# EAGLE board RFBoardLayoutGen0_v03.2TAD (EAGLE 7.5.0)
AUTHOR: Kirchschlager Raimund
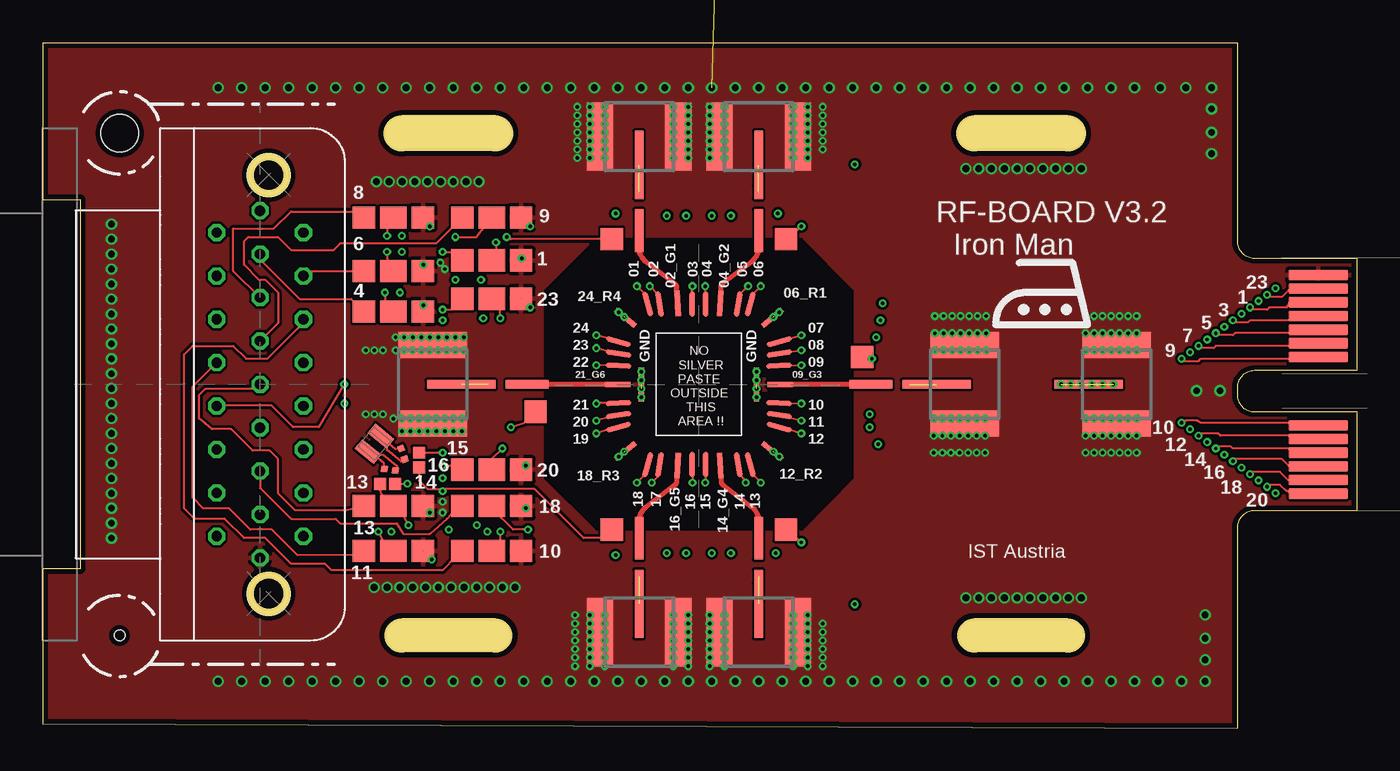
[diagram p0: board, top side]
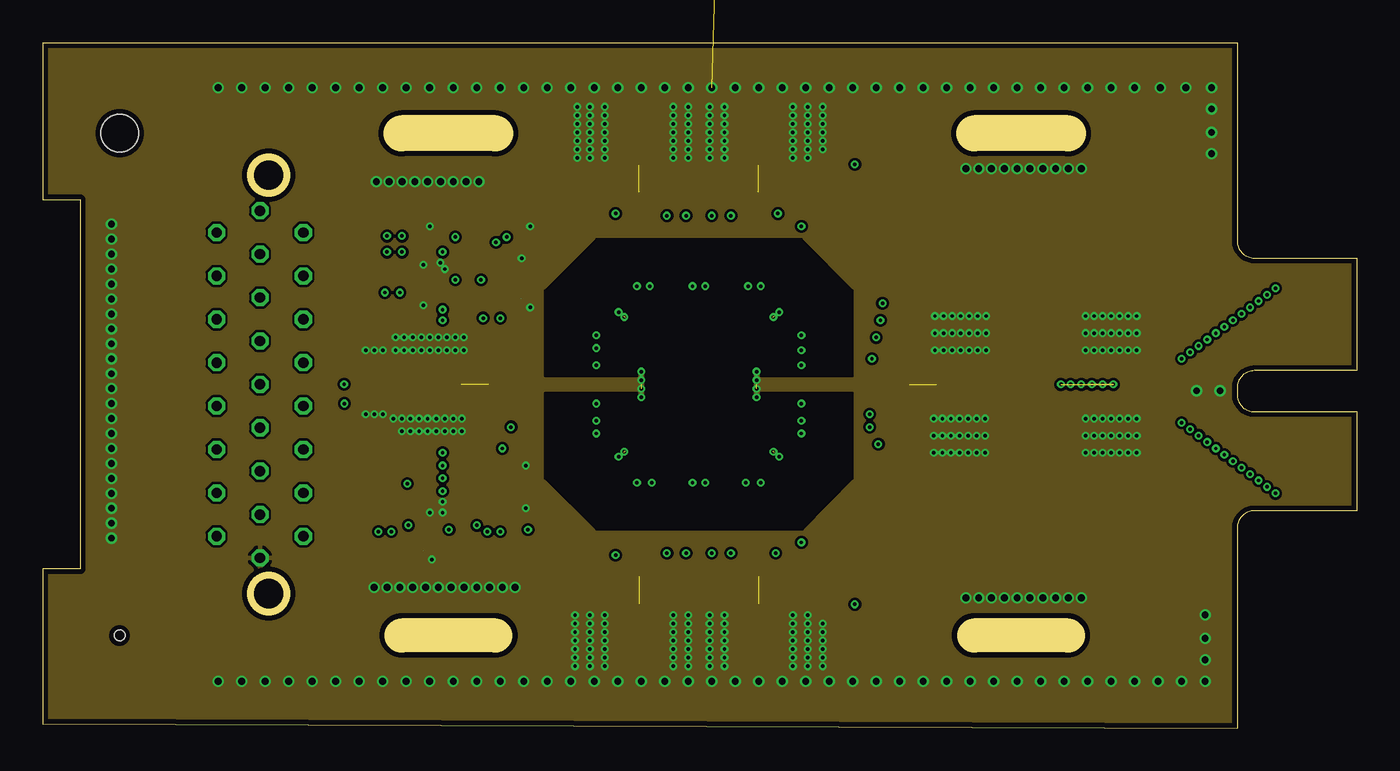
[diagram p1: board, inner layer Route2]
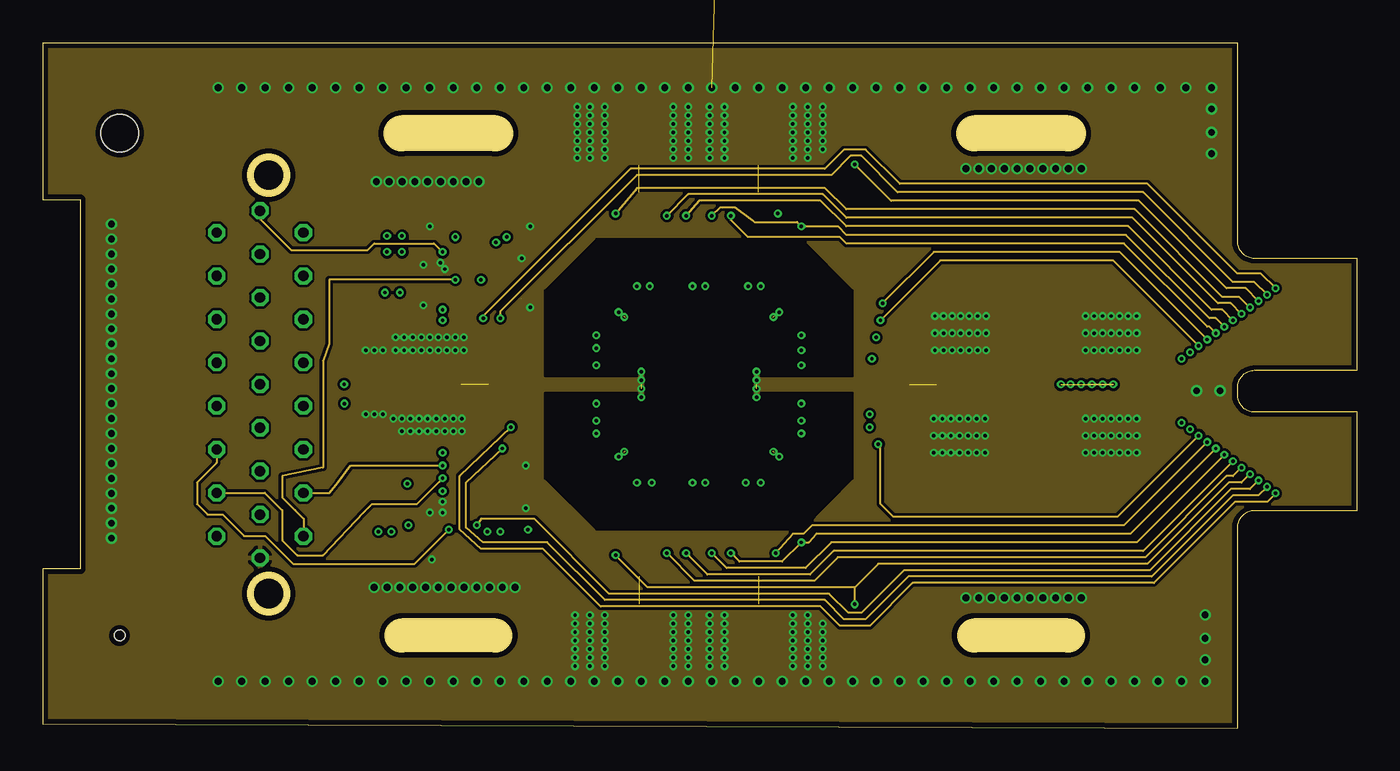
[diagram p2: board, inner layer Route3]
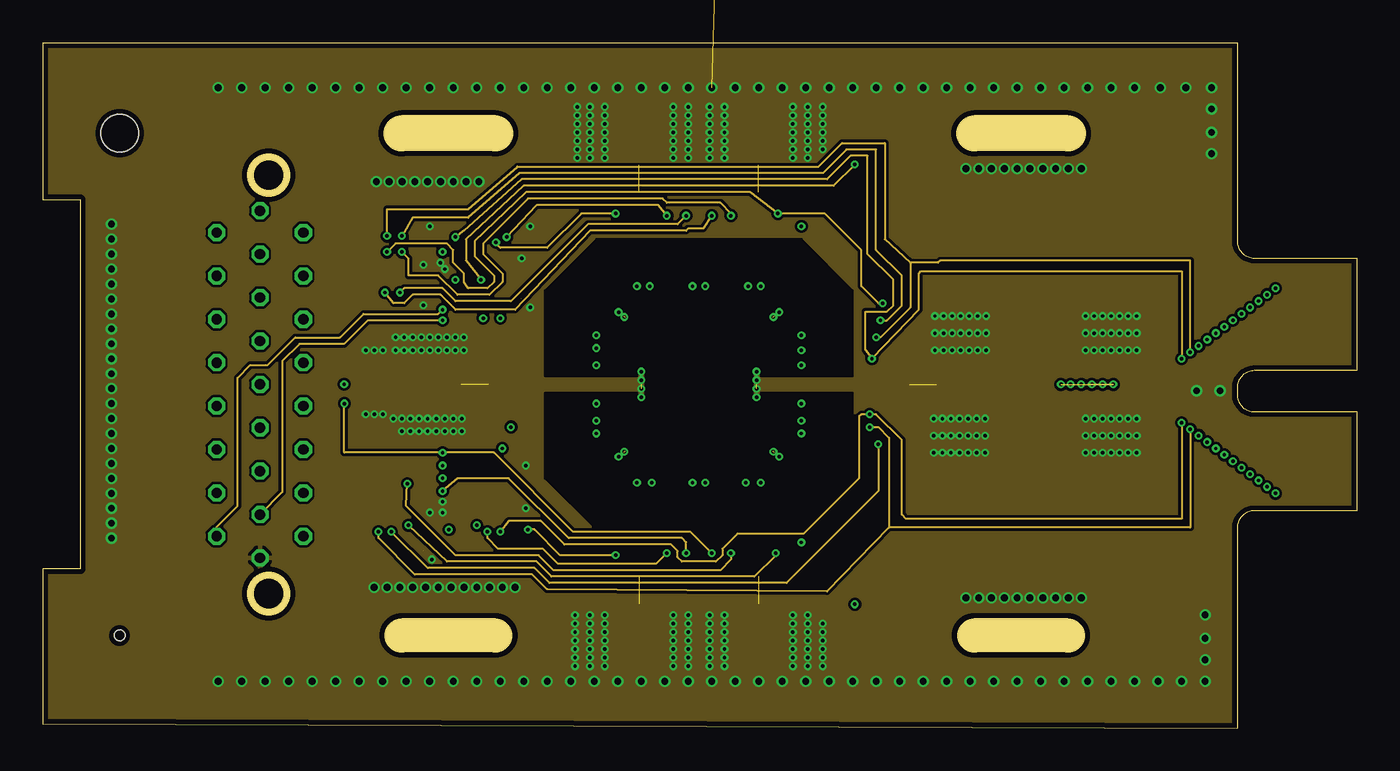
[diagram p3: board, inner layer Route14]
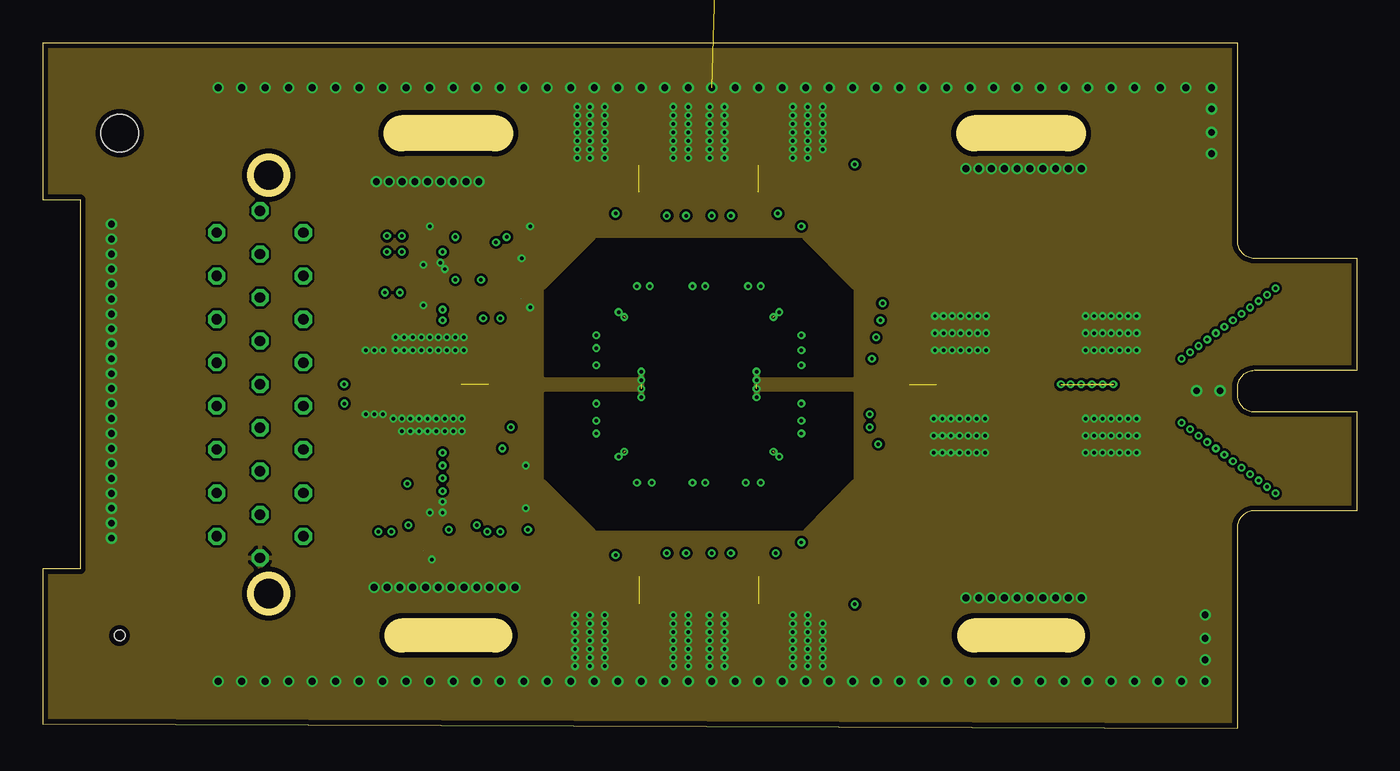
[diagram p4: board, inner layer Route15]
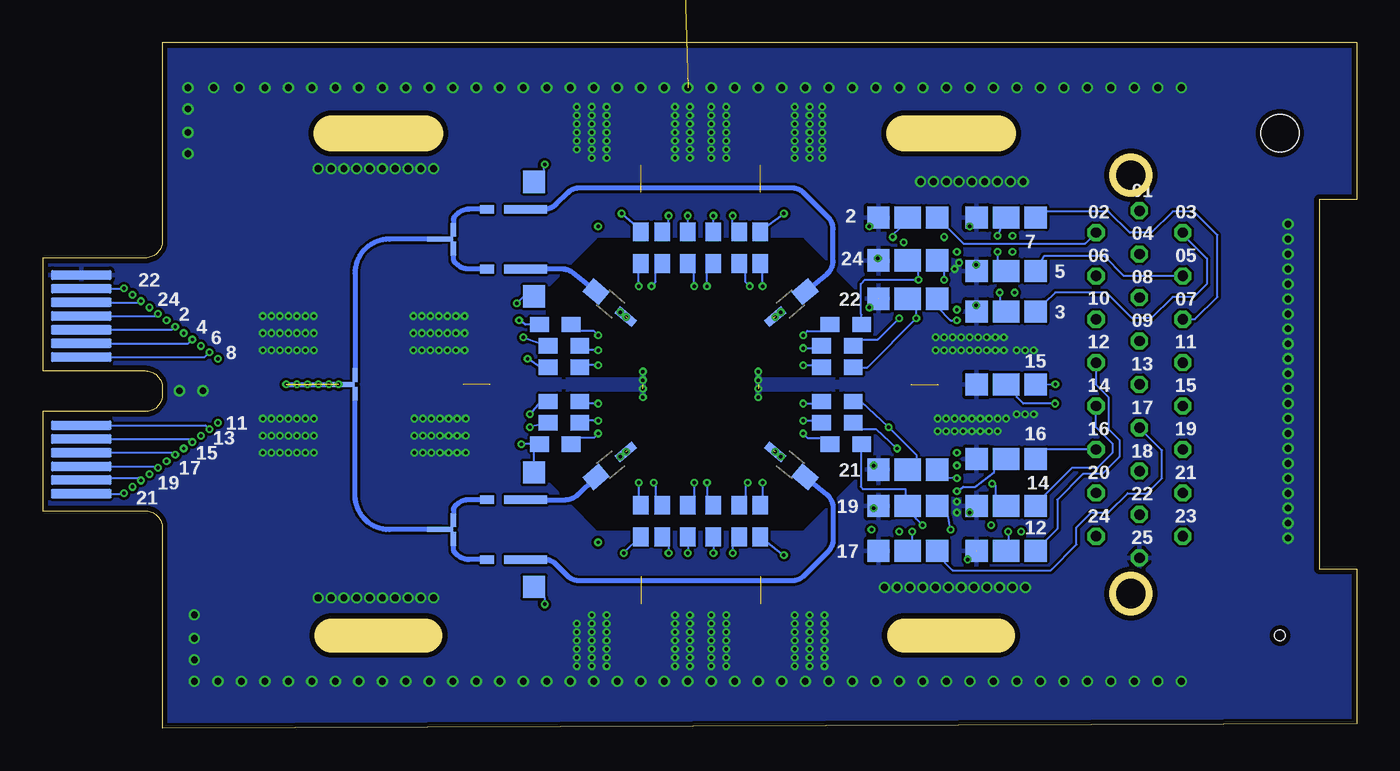
[diagram p5: board, bottom side, seen from below]

Size 76.9 x 40.12 mm. Coordinates in mm from the lower left corner, seen from the top.
Outline: 26.5,5.43 21,5.43
Outline: 26.5,34.83 21,34.83
Outline: 60,34.83 54.5,34.83
Outline: 60,5.43 54.5,5.43
Outline: 0,40.12 0,30.93 2.2,30.93 2.2,9.32 0,9.32 0,0.25 69.9,0 69.9,11.72 arc-90 70.9,12.72 76.9,12.72 76.9,18.52 70.9,18.52 arc-90 69.9,19.52 69.9,19.93 arc-90 70.9,20.93 76.9,20.93 76.9,27.52 70.9,27.52 arc-90 69.9,28.52 69.9,40.12 0,40.12
Outline: circle at 13.22,7.88 radius 1.06
Outline: circle at 13.22,32.38 radius 1.06
Copper layers (1+2+3*14+15+16): Top 0.035mm / dielectric 0.2mm / Route2 0.035mm / dielectric 0.36mm / Route3 0.035mm / dielectric 0.28mm / Route14 0.035mm / dielectric 0.36mm / Route15 0.035mm / dielectric 0.2mm / Bottom 0.035mm
Design rules "PCB-POOL HighSpec_ML6+ *": minimum track width 0.125mm, minimum drill 0.2mm, track to track 0.125mm, track to pad 0.125mm, pad to pad 0.125mm, via to via 0.125mm, smd to smd 0.125mm, copper to edge 0.3mm, drill to drill 0.2mm, minimum pad ring 0.2mm, minimum via ring 0.125mm, stop-mask expansion 0.065mm, vias tented up to drill 0.3mm, thermal gap 0.2mm
Net classes: 0 GND: clearance 0.15 mm; 1 RF: clearance 2 mm
Holes 0.6 mm at 4.5,5.43
Holes 2.2 mm at 4.5,34.83

## Footprints (pad centres in the part's own frame; a part is rotated, then mirrored left to right if it is on the bottom)
BIAS_TEE_DOWN_0603 = smd 0.8 x 0.5: HF 2.75,0 | smd 1.3 x 1.3: LF 0,1.6 | smd 2.5 x 0.5: OUT 0.5,0
BIAS_TEE_UP_0603 = smd 0.8 x 0.5: HF 2.75,0 | smd 1.3 x 1.3: LF 0,-1.6 | smd 2.5 x 0.5: OUT 0.5,0
24DC+10RF/400MU-PADS/0.7X0.7_V1.0 = smd 1.5 x 0.3 rotated 105: DC$01 -3,4.7 | smd 1.5 x 0.3 rotated 99: DC§02 -2.3,4.7 | smd 0.3 x 1.5: DC§03 -0.4,4.7; DC§04 0.4,4.7; DC§15 0.4,-4.7; DC§16 -0.4,-4.7 | smd 1.5 x 0.3 rotated 81: DC§05 2.3,4.7 | smd 1.5 x 0.3 rotated 75: DC§06 3,4.7 | smd 1.5 x 0.3 rotated 195: DC§07 4.7,2.5 | smd 1.5 x 0.3 rotated 189: DC§08 4.7,1.8 | smd 1.5 x 0.3 rotated 183: DC§09 4.7,1.1 | smd 1.5 x 0.3 rotated 177: DC§10 4.7,-1.1 | smd 1.5 x 0.3 rotated 171: DC§11 4.7,-1.8 | smd 1.5 x 0.3 rotated 165: DC§12 4.7,-2.5 | smd 1.5 x 0.3 rotated 285: DC§13 3,-4.7 | smd 1.5 x 0.3 rotated 279: DC§14 2.3,-4.7 | smd 1.5 x 0.3 rotated 261: DC§17 -2.3,-4.7 | smd 1.5 x 0.3 rotated 255: DC§18 -3,-4.7 | smd 1.5 x 0.3 rotated 15: DC§19 -4.7,-2.5 | smd 1.5 x 0.3 rotated 9: DC§20 -4.7,-1.8 | smd 1.5 x 0.3 rotated 3: DC§21 -4.7,-1.1 | smd 1.5 x 0.3 rotated 357: DC§22 -4.7,1.1 | smd 1.5 x 0.3 rotated 351: DC§23 -4.7,1.8 | smd 1.5 x 0.3 rotated 345: DC§24 -4.7,2.5 | smd 0.3 x 2: GND$1 -3.375,0; GND$2 3.375,0 | smd 1.5 x 0.3 rotated 93: RF$02_G1 -1.25,4.75 | smd 1.5 x 0.3 rotated 87: RF$04_G2 1.25,4.75 | smd 1.5 x 0.3 rotated 40: RF$06_R1 4.3,3.9; RF$18_R3 -4.3,-3.9 | smd 1.5 x 0.3: RF$09_G3 4.75,0; RF$21_G6 -4.75,0 | smd 1.5 x 0.3 rotated 140: RF$12_R2 4.3,-3.9; RF$24_R4 -4.3,3.9 | smd 1.5 x 0.3 rotated 273: RF$14_G4 1.25,-4.75 | smd 1.5 x 0.3 rotated 267: RF$16_G5 -1.25,-4.75
25_SOCKET_M83513/13-D_V2 = drill 0.6 octagon: 01 10.16,0; 02 8.89,-2.54; 03 8.89,2.54; 04 7.62,0; 05 6.35,2.54; 06 6.35,-2.54; 07 3.81,2.54; 08 5.08,0; 09 2.54,0; 10 3.81,-2.54; 11 1.27,2.54; 12 1.27,-2.54; 13 0,0; 14 -1.27,-2.54; 15 -1.27,2.54; 16 -3.81,-2.54; 17 -2.54,0; 18 -5.08,0; 19 -3.81,2.54; 20 -6.35,-2.54; 21 -6.35,2.54; 22 -7.62,0; 23 -8.89,2.54; 24 -8.89,-2.54; 25 -10.16,0
SMD0.8-0,5 = smd 0.8 x 0.5: 1 0,0
L_MATCH = smd 1.25 x 1: IN 1.125,0 | smd 1.3 x 0.5: OUT -1.15,0
LP-FILTER/1_STAGE/OS/0603_TOP = smd 1.3 x 1.3: $1 -1.6,0.01; $6 1.85,0.01 | smd 1.55 x 1.3: $4 0.125,0.01
LP-FILTER/1_STAGE/OS/0603_BOTTOM = smd 1.3 x 1.3 bottom: $1 -1.6,0.01; $6 1.85,0.01 | smd 1.55 x 1.3 bottom: $4 0.125,0.01
LP-FILTER/RESISTOR/0603_BOTTOM = smd 1.1 x 0.9 bottom: IN -0.925,0; OUT 0.925,0
SMP_STRAIGHT_MINI_WIDE = smd 0.5 x 4: 1 0,1.653 | smd 1.524 x 4: 2@1 -2.292,0; 2@2 2.292,0
TP07SQ = smd 0.7 x 0.7: TP 0,0
MEC8-113-02-L-D-RA1 = smd 0.6 x 3.5: 1 6.4,0.15; 3 5.6,0.15; 5 4.8,0.15; 7 4,0.15; 9 3.2,0.15; 11 2.4,0.15; 13 -1.6,0.15; 15 -2.4,0.15; 17 -3.2,0.15; 19 -4,0.15; 21 -4.8,0.15; 23 -5.6,0.15; 25 -6.4,0.15 | smd 0.6 x 3.5 bottom: 2 6.4,0.15; 4 5.6,0.15; 6 4.8,0.15; 8 4,0.15; 10 3.2,0.15; 12 2.4,0.15; 14 -1.6,0.15; 16 -2.4,0.15; 18 -3.2,0.15; 20 -4,0.15; 22 -4.8,0.15; 24 -5.6,0.15; 26 -6.4,0.15
RX-BR_V1 = smd 0.406 x 0.406 rotated 105: I$1 -0.02,1.08; U$1 0.63,1.23 | smd 0.406 x 0.406 rotated 165: I$2 1.08,-0.02; U$2 1.23,0.63 | smd 1.422 x 0.711 rotated 45: P$2 -0.02,-0.87; P$3 -0.87,-0.02
T_JUNCTION_0.3MM = smd 0.3 x 1.5 bottom: P$1 0,-0.75 | smd 0.8 x 0.3 bottom: P$2 -0.55,0.03; P$3 0.55,0.03 | smd 1 x 0.125 bottom: P$4 0,-0.06

## Placement (x,y rotation side)
B$1  [BIAS_TEE_DOWN_0603]  34.9,28.62 90 top
B$2  [BIAS_TEE_UP_0603]  41.9,28.62 90 top
B$3  BIASTEEDOWN  [BIAS_TEE_DOWN_0603]  47.96,20.12 0 top
B$4  [BIAS_TEE_DOWN_0603]  41.9,11.62 270 top
B$5  [BIAS_TEE_UP_0603]  34.9,11.62 270 top
B$6  BIASTEEDOWN  [BIAS_TEE_DOWN_0603]  28.84,20.12 180 top
B$7  [BIAS_TEE_UP_0603]  48.15,30.38 180 bottom
B$8  [BIAS_TEE_DOWN_0603]  48.15,26.88 180 bottom
B$9  [BIAS_TEE_UP_0603]  48.15,13.38 180 bottom
B$10  [BIAS_TEE_DOWN_0603]  48.15,9.88 180 bottom
E$1  24DC+10RF  [24DC+10RF/400MU-PADS/0.7X0.7_V1.0]  38.4,20.12 0 top
E$2  [25_SOCKET_M83513/13-D_V2]  12.71,20.12 90 top
E$30  [SMD0.8-0,5]  50.9,13.38 0 bottom
L$1  L_MATCH  [L_MATCH]  33.14,24.82 40 bottom
L$2  L_MATCH  [L_MATCH]  43.66,24.82 140 bottom
L$3  L_MATCH  [L_MATCH]  43.66,15.43 220 bottom
L$4  L_MATCH  [L_MATCH]  33.14,15.43 320 bottom
LP$1  LP-FILTER/1-STAGETOP  [LP-FILTER/1_STAGE/OS/0603_TOP]  20.4,29.88 0 top
LP$2  LP-FILTER/1-STAGETOP  [LP-FILTER/1_STAGE/OS/0603_TOP]  20.4,26.75 0 top
LP$3  LP-FILTER/1-STAGETOP  [LP-FILTER/1_STAGE/OS/0603_TOP]  20.4,24.38 0 top
LP$4  LP-FILTER/1-STAGETOP  [LP-FILTER/1_STAGE/OS/0603_TOP]  20.4,20.12 180 bottom
LP$5  LP-FILTER/1-STAGETOP  [LP-FILTER/1_STAGE/OS/0603_TOP]  20.4,13 0 top
LP$6  LP-FILTER/1-STAGETOP  [LP-FILTER/1_STAGE/OS/0603_TOP]  20.4,10.38 0 top
LP$7  LP-FILTER/1-STAGEBOT  [LP-FILTER/1_STAGE/OS/0603_BOTTOM]  20.4,29.88 0 top
LP$8  LP-FILTER/1-STAGEBOT  [LP-FILTER/1_STAGE/OS/0603_BOTTOM]  20.4,26.75 0 top
LP$9  LP-FILTER/1-STAGEBOT  [LP-FILTER/1_STAGE/OS/0603_BOTTOM]  20.4,24.38 0 top
LP$10  LP-FILTER/1-STAGEBOT  [LP-FILTER/1_STAGE/OS/0603_BOTTOM]  26.15,29.88 0 top
LP$11  LP-FILTER/1-STAGEBOT  [LP-FILTER/1_STAGE/OS/0603_BOTTOM]  26.15,10.38 0 top
LP$12  LP-FILTER/1-STAGEBOT  [LP-FILTER/1_STAGE/OS/0603_BOTTOM]  20.4,15.75 0 top
LP$13  LP-FILTER/1-STAGEBOT  [LP-FILTER/1_STAGE/OS/0603_BOTTOM]  20.4,13 0 top
LP$14  LP-FILTER/1-STAGEBOT  [LP-FILTER/1_STAGE/OS/0603_BOTTOM]  20.4,10.38 0 top
LP$15  LP-FILTER/1-STAGETOP  [LP-FILTER/1_STAGE/OS/0603_TOP]  26.15,29.88 0 top
LP$16  LP-FILTER/1-STAGETOP  [LP-FILTER/1_STAGE/OS/0603_TOP]  26.15,27.38 0 top
LP$17  LP-FILTER/1-STAGETOP  [LP-FILTER/1_STAGE/OS/0603_TOP]  26.15,25.12 0 top
LP$18  LP-FILTER/1-STAGETOP  [LP-FILTER/1_STAGE/OS/0603_TOP]  26.15,15.12 0 top
LP$19  LP-FILTER/1-STAGETOP  [LP-FILTER/1_STAGE/OS/0603_TOP]  26.15,13 0 top
LP$20  LP-FILTER/1-STAGETOP  [LP-FILTER/1_STAGE/OS/0603_TOP]  26.15,10.38 0 top
LP$21  LP-FILTER/1-STAGEBOT  [LP-FILTER/1_STAGE/OS/0603_BOTTOM]  26.15,27.38 0 top
LP$22  LP-FILTER/1-STAGEBOT  [LP-FILTER/1_STAGE/OS/0603_BOTTOM]  26.15,25.12 0 top
LP$23  LP-FILTER/1-STAGEBOT  [LP-FILTER/1_STAGE/OS/0603_BOTTOM]  26.15,15.12 0 top
LP$24  LP-FILTER/1-STAGEBOT  [LP-FILTER/1_STAGE/OS/0603_BOTTOM]  26.15,13 0 top
R$1  10K  [LP-FILTER/RESISTOR/0603_BOTTOM]  34.9,28.12 270 top
R$2  10K  [LP-FILTER/RESISTOR/0603_BOTTOM]  36.15,28.12 270 top
R$3  10K  [LP-FILTER/RESISTOR/0603_BOTTOM]  37.65,28.12 270 top
R$4  10K  [LP-FILTER/RESISTOR/0603_BOTTOM]  39.15,28.12 270 top
R$5  10K  [LP-FILTER/RESISTOR/0603_BOTTOM]  40.65,28.12 270 top
R$6  10K  [LP-FILTER/RESISTOR/0603_BOTTOM]  41.9,28.12 270 top
R$7  10K  [LP-FILTER/RESISTOR/0603_BOTTOM]  46.4,22.38 180 top
R$8  10K  [LP-FILTER/RESISTOR/0603_BOTTOM]  46.4,21.12 180 top
R$9  10K  [LP-FILTER/RESISTOR/0603_BOTTOM]  46.4,19.12 180 top
R$10  10K  [LP-FILTER/RESISTOR/0603_BOTTOM]  46.4,17.88 180 top
R$11  10K  [LP-FILTER/RESISTOR/0603_BOTTOM]  46.9,16.62 180 top
R$12  10K  [LP-FILTER/RESISTOR/0603_BOTTOM]  41.9,12.12 90 top
R$19  10K  [LP-FILTER/RESISTOR/0603_BOTTOM]  29.9,16.62 0 top
R$20  10K  [LP-FILTER/RESISTOR/0603_BOTTOM]  30.4,17.88 0 top
R$21  10K  [LP-FILTER/RESISTOR/0603_BOTTOM]  30.4,19.12 0 top
R$22  10K  [LP-FILTER/RESISTOR/0603_BOTTOM]  30.4,21.12 0 top
R$23  10K  [LP-FILTER/RESISTOR/0603_BOTTOM]  30.4,22.38 0 top
R$24  10K  [LP-FILTER/RESISTOR/0603_BOTTOM]  29.9,23.62 0 top
R$25  10K  [LP-FILTER/RESISTOR/0603_BOTTOM]  46.9,23.62 180 top
R$26  10K  [LP-FILTER/RESISTOR/0603_BOTTOM]  40.65,12.12 90 top
R$27  10K  [LP-FILTER/RESISTOR/0603_BOTTOM]  39.15,12.12 90 top
R$28  10K  [LP-FILTER/RESISTOR/0603_BOTTOM]  37.65,12.12 90 top
R$29  10K  [LP-FILTER/RESISTOR/0603_BOTTOM]  36.15,12.12 90 top
R$30  10K  [LP-FILTER/RESISTOR/0603_BOTTOM]  34.9,12.12 90 top
S$1  MC-921WIDE  [SMP_STRAIGHT_MINI_WIDE]  22.84,20.12 270 top
S$2  MC-921WIDE  [SMP_STRAIGHT_MINI_WIDE]  34.9,5.62 0 top
S$3  MC-921WIDE  [SMP_STRAIGHT_MINI_WIDE]  41.9,5.62 0 top
S$4  MC-921WIDE  [SMP_STRAIGHT_MINI_WIDE]  53.96,20.12 90 top
S$5  MC-921WIDE  [SMP_STRAIGHT_MINI_WIDE]  62.85,20.12 90 top
S$6  MC-921WIDE  [SMP_STRAIGHT_MINI_WIDE]  41.9,34.62 180 top
S$7  MC-921WIDE  [SMP_STRAIGHT_MINI_WIDE]  34.9,34.62 180 top
TP1  TPTP07SQ  [TP07SQ]  22.02,16.12 0 top
TP2  TPTP07SQ  [TP07SQ]  22.02,15.25 0 top
TP3  TPTP07SQ  [TP07SQ]  20.62,14.31 0 top
TP4  TPTP07SQ  [TP07SQ]  19.74,14.31 90 top
U$1  MEC8-113-02-L-D-RA1MBRD  [MEC8-113-02-L-D-RA1]  74.5,20.12 270 top
U$2  TEMPSENS  [RX-BR_V1]  19.9,16.25 275.6 top
U$3  TJUNCTION  [T_JUNCTION_0.3MM]  52.9,28.62 90 top
U$4  TJUNCTION  [T_JUNCTION_0.3MM]  58.65,20.12 90 top
U$5  TJUNCTION  [T_JUNCTION_0.3MM]  52.9,11.62 90 top

## Library data of the parts
B$1-B$10 = Bias tee
E$1 = SampleArea
E$2 = Glenair
E$30 = PADS
L$1-L$4 = MatchCircuit
LP$1-LP$24 R$1-R$12 R$19-R$30 = LPFilter
S$1-S$7 = RF Connectors
TP1-TP4 = testpad
U$1 = MEC8-130-02-X-D-RA1
U$2 = TempSensors
U$3-U$5 = RF layout parts

## Nets
$1234567254654: E$1.GND$1 E$1.GND$2 E$2.25 LP$1.$6 LP$2.$6 LP$3.$6 LP$4.$6 LP$5.$6 LP$6.$6 LP$7.$6 LP$8.$6 LP$9.$6 LP$10.$6 LP$11.$6 LP$12.$6 LP$13.$6 LP$14.$6 LP$15.$6 LP$16.$6 LP$17.$6 LP$18.$6 LP$19.$6 LP$20.$6 LP$21.$6 LP$22.$6 LP$23.$6 LP$24.$6 S$1.2@1 S$1.2@2 S$2.2@1 S$2.2@2 S$3.2@1 S$3.2@2 S$4.2@1 S$4.2@2 S$5.2@1 S$5.2@2 S$6.2@1 S$6.2@2 S$7.2@1 S$7.2@2 U$1.25 U$1.26
C$1: E$2.01 LP$16.$1
C$2: E$2.02 LP$10.$1
C$3: E$2.03 LP$9.$1
C$4: E$2.04 LP$3.$1
C$5: E$2.05 LP$8.$1
C$6: E$2.06 LP$2.$1
C$7: E$2.07 LP$7.$1
C$8: E$2.08 LP$1.$1
C$9: E$2.09 LP$15.$1
C$10: E$2.10 LP$20.$1
C$11: E$2.11 LP$6.$1
C$12: E$2.12 LP$14.$1
C$13: E$2.13 LP$5.$1
C$14: E$2.14 LP$13.$1
C$15: E$2.15 LP$4.$1
C$16: E$2.16 LP$12.$1
C$17: E$2.17 LP$11.$1
C$18: E$2.18 LP$19.$1
C$19: E$2.19 LP$24.$1
C$20: E$2.20 LP$18.$1
C$21: E$2.21 LP$23.$1
C$22: E$2.22 LP$22.$1
C$23: E$2.23 LP$17.$1
C$24: E$2.24 LP$21.$1
D$1: LP$16.$4 R$1.IN U$1.21
D$2: B$1.LF LP$10.$4 R$2.IN U$1.20
D$3: LP$9.$4 R$3.IN U$1.19
D$4: B$2.LF LP$3.$4 R$4.IN U$1.18
D$5: LP$8.$4 R$5.IN U$1.17
D$6: B$8.LF LP$2.$4 R$6.IN U$1.16
D$7: LP$7.$4 R$25.IN U$1.15
D$8: LP$1.$4 R$7.IN U$1.14
D$9: B$3.LF LP$15.$4 R$8.IN U$1.13
D$10: LP$20.$4 R$9.IN U$1.11
D$11: LP$6.$4 R$10.IN U$1.12
D$12: B$9.LF LP$14.$4 R$11.IN U$1.9
D$13: LP$5.$4 R$12.IN TP4.TP U$1.10
D$14: B$4.LF LP$13.$4 R$26.IN TP3.TP U$1.7
D$15: LP$4.$4 R$27.IN TP1.TP U$1.8
D$16: B$5.LF LP$12.$4 R$28.IN TP2.TP U$1.5
D$17: LP$11.$4 R$29.IN U$1.6
D$18: B$10.LF LP$19.$4 R$30.IN U$1.3
D$19: LP$24.$4 R$19.IN U$1.4
D$20: LP$18.$4 R$20.IN U$1.1
D$21: B$6.LF LP$23.$4 R$21.IN U$1.2
D$22: LP$22.$4 R$22.IN U$1.24
D$23: LP$17.$4 R$23.IN U$1.23
D$24: B$7.LF LP$21.$4 R$24.IN U$1.22
DC$1: E$1.DC$01 R$1.OUT
DC$2: E$1.DC§02 R$2.OUT
DC$3: E$1.DC§03 R$3.OUT
DC$4: E$1.DC§04 R$4.OUT
DC$5: E$1.DC§05 R$5.OUT
DC$6: E$1.DC§06 R$6.OUT
DC$7: E$1.DC§07 R$25.OUT
DC$8: E$1.DC§08 R$7.OUT
DC$9: E$1.DC§09 R$8.OUT
DC$10: E$1.DC§10 R$9.OUT
DC$11: E$1.DC§11 R$10.OUT
DC$12: E$1.DC§12 R$11.OUT
DC$13: E$1.DC§13 R$12.OUT
DC$14: E$1.DC§14 R$26.OUT
DC$15: E$1.DC§15 R$27.OUT
DC$16: E$1.DC§16 R$28.OUT
DC$17: E$1.DC§17 R$29.OUT
DC$18: E$1.DC§18 R$30.OUT
DC$19: E$1.DC§19 R$19.OUT
DC$20: E$1.DC§20 R$20.OUT
DC$21: E$1.DC§21 R$21.OUT
DC$22: E$1.DC§22 R$22.OUT
DC$23: E$1.DC§23 R$23.OUT
DC$24: E$1.DC§24 R$24.OUT
N$1 [RF]: B$6.HF S$1.1
N$2: E$1.RF$12_R2 L$3.OUT
N$3 [RF]: B$1.OUT E$1.RF$02_G1
N$4 [RF]: B$2.OUT E$1.RF$04_G2
N$5 [RF]: B$1.HF S$7.1
N$6 [RF]: B$2.HF S$6.1
N$7 [RF]: B$5.OUT E$1.RF$16_G5
N$8 [RF]: B$4.OUT E$1.RF$14_G4
N$9 [RF]: E$1.RF$18_R3 L$4.OUT
N$10 [RF]: E$1.RF$24_R4 L$1.OUT
N$11 [RF]: E$1.RF$06_R1 L$2.OUT
N$12 [RF]: B$3.OUT E$1.RF$09_G3
N$13 [RF]: B$9.OUT L$3.IN
N$14 [RF]: B$8.OUT L$2.IN
N$15 [RF]: B$9.HF U$5.P$3
N$16 [RF]: B$5.HF S$2.1
N$17 [RF]: B$4.HF S$3.1
N$18 [RF]: B$3.HF S$4.1
N$19 [RF]: B$7.HF U$3.P$3
N$20 [RF]: B$6.OUT E$1.RF$21_G6
N$21 [RF]: S$5.1 U$4.P$1
N$22 [RF]: B$10.HF U$5.P$2
N$23 [RF]: B$8.HF U$3.P$2
N$25 [RF]: U$3.P$1 U$4.P$3
N$26 [RF]: U$4.P$2 U$5.P$1
RF$3 [RF]: B$10.OUT L$4.IN
RF$4 [RF]: B$7.OUT L$1.IN

## Tracks (layer width: path | path; a pad name or v marks a point on that pad's centre or on a via)
$1234567254654  (via drill 0.2, 0.4)  (6 unrouted)
  other vias: 52.21,24.12 52.71,24.12 53.21,24.12 53.71,24.12 54.21,24.12 54.71,24.12 55.21,24.12 52.21,23.12 52.71,23.12 53.21,23.12 53.71,23.12 54.21,23.12 54.71,23.12 55.21,23.12 52.21,22.12 52.71,22.12 53.21,22.12 53.71,22.12 54.21,22.12 54.71,22.12 55.21,22.12 52.15,18.12 52.65,18.12 53.15,18.12 53.65,18.12 54.15,18.12 54.65,18.12 55.15,18.12 52.15,17.12 52.65,17.12 53.15,17.12 53.65,17.12 54.15,17.12 54.65,17.12 55.15,17.12 52.15,16.12 52.65,16.12 53.15,16.12 53.65,16.12 54.15,16.12 54.65,16.12 55.15,16.12 61.02,24.12 61.52,24.12 62.02,24.12 62.52,24.12 63.02,24.12 63.52,24.12 64.03,24.12 61.02,23.12 61.52,23.12 62.02,23.12 62.52,23.12 63.02,23.12 63.52,23.12 64.03,23.12 61.02,22.12 61.52,22.12 62.02,22.12 62.52,22.12 63.02,22.12 63.52,22.12 64.03,22.12 61.02,18.12 61.52,18.12 62.02,18.12 62.52,18.12 63.02,18.12 63.52,18.12 64.03,18.12 61.02,17.12 61.52,17.12 62.02,17.12 62.52,17.12 63.02,17.12 63.52,17.12 64.03,17.12 61.02,16.12 61.52,16.12 62.02,16.12 62.52,16.12 63.02,16.12 63.52,16.12 64.03,16.12 32.9,36.38 32.9,35.88 32.9,35.38 32.9,34.88 32.9,34.38 32.9,33.88 32.9,33.38 32.02,36.38 32.02,35.88 32.02,35.38 32.02,34.88 32.02,34.38 32.02,33.88 32.02,33.38 31.27,33.38 31.27,33.88 31.27,34.38 31.27,34.88 31.27,35.38 31.27,35.88 31.27,36.38 36.9,36.38 36.9,35.88 36.9,35.38 36.9,34.88 36.9,34.38 36.9,33.88 36.9,33.38 39.9,36.38 39.9,35.88 39.9,35.38 39.9,34.88 39.9,34.38 39.9,33.88 39.9,33.38 37.77,36.38 37.77,35.88 37.77,35.38 37.77,34.88 37.77,34.38 37.77,33.88 37.77,33.38 39.02,33.38 39.02,33.88 39.02,34.38 39.02,34.88 39.02,35.38 39.02,35.88 39.02,36.38 43.9,36.38 43.9,35.88 43.9,35.38 43.9,34.88 43.9,34.38 43.9,33.88 43.9,33.38 44.77,33.38 44.77,33.88 44.77,34.38 44.77,34.88 44.77,35.38 44.77,35.88 44.77,36.38 45.65,33.88 45.65,34.38 45.65,34.88 45.65,35.38 45.65,35.88 45.65,36.38 32.9,6.62 32.9,6.12 32.9,5.62 32.9,5.12 32.9,4.62 32.9,4.12 32.9,3.62 36.9,6.62 36.9,6.12 36.9,5.62 36.9,5.12 36.9,4.62 36.9,4.12 36.9,3.62 37.77,6.62 37.77,6.12 37.77,5.62 37.77,5.12 37.77,4.62 37.77,4.12 37.77,3.62 32.02,6.62 32.02,6.12 32.02,5.62 32.02,5.12 32.02,4.62 32.02,4.12 32.02,3.62 39.9,6.62 39.9,6.12 39.9,5.62 39.9,5.12 39.9,4.62 39.9,4.12 39.9,3.62 39.02,3.62 39.02,4.12 39.02,4.62 39.02,5.12 39.02,5.62 39.02,6.12 39.02,6.62 43.9,6.62 43.9,6.12 43.9,5.62 43.9,5.12 43.9,4.62 43.9,4.12 43.9,3.62 44.77,3.62 44.77,4.12 44.77,4.62 44.77,5.12 44.77,5.62 44.77,6.12 44.77,6.62 31.15,6.62 31.15,6.12 31.15,5.62 31.15,5.12 31.15,4.62 31.15,4.12 31.15,3.62 45.65,6.12 45.65,5.62 45.65,5.12 45.65,4.62 45.65,4.12 45.65,3.62 24.52,18.12 24.02,18.12 23.52,18.12 23.02,18.12 22.52,18.12 22.02,18.12 21.52,18.12 21.02,18.12 24.65,22.12 24.15,22.12 23.65,22.12 23.15,22.12 22.65,22.12 22.15,22.12 21.65,22.12 21.15,22.12 21.02,17.38 21.52,17.38 22.02,17.38 22.52,17.38 23.02,17.38 23.52,17.38 24.02,17.38 24.52,17.38 20.52,18.12 20.65,22.12 24.65,22.88 24.15,22.88 23.65,22.88 23.15,22.88 22.65,22.88 22.15,22.88 21.65,22.88 21.15,22.88 20.65,22.88 4.02,29.5 4.02,28.62 4.02,27.75 4.02,26.88 4.02,26 4.02,25.12 4.02,24.25 4.02,23.38 4.02,22.5 4.02,21.62 4.02,20.75 4.02,19.88 4.02,19 4.02,18.12 4.02,17.25 4.02,16.38 4.02,15.5 4.02,14.62 4.02,13.75 4.02,12.88 4.02,12 4.02,11.12 41.9,37.5 43.27,37.5 40.52,37.5 39.15,37.5 37.77,37.5 36.4,37.5 35.02,37.5 33.65,37.5 32.27,37.5 30.9,37.5 29.52,37.5 28.15,37.5 26.77,37.5 25.4,37.5 24.02,37.5 22.65,37.5 21.27,37.5 19.9,37.5 18.52,37.5 17.15,37.5 15.77,37.5 14.4,37.5 13.02,37.5 11.65,37.5 10.27,37.5 44.65,37.5 46.02,37.5 47.4,37.5 48.77,37.5 50.15,37.5 51.52,37.5 52.9,37.5 54.27,37.5 55.65,37.5 57.02,37.5 58.4,37.5 59.77,37.5 61.15,37.5 62.52,37.5 63.9,37.5 65.4,37.5 25.52,32 24.77,32 24.02,32 23.27,32 22.52,32 21.77,32 21.02,32 20.27,32 19.52,32 54.02,32.75 54.77,32.75 55.52,32.75 56.27,32.75 57.02,32.75 57.77,32.75 58.52,32.75 59.27,32.75 60.02,32.75 60.77,32.75 54.02,7.62 54.77,7.62 55.52,7.62 56.27,7.62 57.02,7.62 57.77,7.62 58.52,7.62 59.27,7.62 60.02,7.62 60.77,7.62 19.4,8.25 20.15,8.25 20.9,8.25 21.65,8.25 22.4,8.25 23.15,8.25 23.9,8.25 24.65,8.25 25.4,8.25 26.15,8.25 26.9,8.25 27.65,8.25 10.27,2.75 11.65,2.75 13.02,2.75 14.4,2.75 15.77,2.75 17.15,2.75 18.52,2.75 19.9,2.75 21.27,2.75 22.65,2.75 24.02,2.75 25.4,2.75 26.77,2.75 28.15,2.75 29.52,2.75 30.9,2.75 32.27,2.75 33.65,2.75 35.02,2.75 36.4,2.75 37.77,2.75 39.15,2.75 40.52,2.75 41.9,2.75 43.27,2.75 44.65,2.75 46.02,2.75 47.4,2.75 48.77,2.75 50.15,2.75 51.52,2.75 52.9,2.75 54.27,2.75 55.65,2.75 57.02,2.75 58.4,2.75 59.77,2.75 61.15,2.75 62.52,2.75 63.9,2.75 65.28,2.75 68.9,19.75 67.53,19.75 35.02,20.88 35.02,19.38 35.02,20.38 35.02,19.88 41.77,20.38 41.77,19.88 41.77,20.88 41.77,19.38 23.4,13.25 23.4,12.62 19.9,18.38 19.4,18.38 18.9,18.38 19.9,22.12 19.4,22.12 18.9,22.12 23.27,27.25 23.52,26.88 22.65,29.38 28.52,29.38 22.27,27.12 28.02,27.5 28.52,24.62 22.27,24.75 22.65,12.62 22.77,9.88 28.27,12.88 28.27,15.38 66.9,37.5 68.4,37.5 68.4,36.25 68.4,34.88 68.4,33.62 66.65,2.75 68.03,2.75 68.03,4 68.03,5.25 68.03,6.62
  pour Top (rank 6): -4.85,41.73 81.6,41.83 81.6,-2.57 -4.85,-2.68
  pour Route2 (rank 6): -7.5,43.23 82.1,43.73 82.1,-3.02 -7.5,-3.52
  pour Route15 (rank 6): -11.25,46.62 84.4,46.62 84.4,-9.27 -11.25,-9.27
  pour Route3 (rank 6): -15.4,49.92 85.9,49.92 85.9,-11.73 -15.4,-11.62
  pour Bottom (rank 6): -16.65,51.42 86.65,51.33 86.65,-13.73 -16.65,-13.62
  pour Route14 (rank 6): -12.9,47.42 85.4,47.33 85.4,-10.73 -12.9,-10.62
C$1  (via drill 0.2)
  Top 0.125: v23.4,27.88 24.18,27.88 LP$16.$1
  Route3 0.125: E$2.01 12.71,29.81 14.52,28 19.02,28 19.4,28.38 22.9,28.38 v23.4,27.88
C$2
  Bottom 0.125: LP$10.$1 24.53,29.88 23.02,28.38 15.89,28.38 E$2.02
C$3
  Bottom 0.125: 10.17,28.9 8.77,27.5 8.77,26 9.52,25.25 10.77,25.25 12.02,24 13.15,24 14.65,25.5 17.65,25.5 18.27,24.88 18.31,24.88
  Bottom 0.3: E$2.03 10.17,28.9 | 18.31,24.88 LP$9.$1
C$4
  Top 0.125: LP$3.$1 18.06,25.12 15.02,25.12 12.71,27.43 E$2.04
C$5
  Bottom 0.125: E$2.05 13.62,26.48 14.77,27.62 18.31,27.62 LP$8.$1
C$6
  Top 0.125: E$2.06 15.52,26.75 LP$2.$1
C$7
  Bottom 0.125: E$2.07 9.46,23.93 8.15,25.25 8.15,28.88 9.52,30.25 10.77,30.25 12.02,29 13.27,29 14.52,30.25 18.43,30.25 LP$7.$1
C$8
  Top 0.125: LP$1.$1 18.4,29.88 18.27,30.25 14.52,30.25 13.52,29.25 11.15,29.25 11.15,26.77 E$2.08
  Top 0.3: LP$1.$1
C$9
  Top 0.125: LP$15.$1 24.3,29.65 23.02,28.38 17.4,28.38 17.02,28 14.52,28 13.77,28.75 12.02,28.75 11.77,28.5 11.77,27.12 12.65,26.25 13.02,26.25 13.77,25.5 13.77,23.73 E$2.09
C$10
  Top 0.125: LP$20.$1 24.17,10.03 23.4,9.25 16.9,9.25 16.52,9.62 14.52,9.62 13.02,11.12 11.77,11.12 10.65,12.25 8.9,12.25 8.27,12.88 8.27,21.88 8.77,22.38 11.15,22.38 11.9,21.62 13.15,21.62 15.02,23.5 15.07,23.75 E$2.10
C$11
  Top 0.125: LP$6.$1 18.54,10.38 18.27,10.12 14.89,10.13 13.4,11.62 12.15,11.62 10.9,12.88 9.4,12.88 8.77,13.5 8.77,20 E$2.11
C$12
  Bottom 0.125: E$2.12 15.25,20.11 14.52,19.38 14.52,17.5 13.9,16.88 13.9,15.88 14.9,14.88 16.02,14.88 17.52,13.38 17.52,11.66 LP$14.$1
C$13
  Top 0.125: LP$5.$1 18.8,12.97 17.77,12.75 14.77,12.75 13.77,13.75 13.77,15.75 13.27,16.25 12.27,16.25 11.02,17.5 9.9,17.5 9.15,18.12 9.15,19.5 9.52,19.88 12.46,19.88 E$2.13
C$14
  Bottom 0.125: LP$13.$1 18.55,13.35 16.65,15.25 15.15,15.25 14.27,16.12 14.27,16.62 15.27,17.62 15.27,18.84 E$2.14
C$15  (via drill 0.2)
  Top 0.125: v17.64,20.14 16.15,17.62 14.65,17.62 13.4,18.88 10.2,18.88 E$2.15
  Bottom 0.125: LP$4.$1 v17.64,20.14
C$16
  Bottom 0.125: E$2.16 18.37,16.32 LP$12.$1
C$17
  Bottom 0.125: LP$11.$1 24.53,10.13 23.65,9.25 17.9,9.25 16.4,10.75 16.4,11.75 15.52,12.62 14.52,12.62 13.4,13.75 12.27,13.75 11.4,14.62 11.4,16.27 E$2.17
C$18
  Top 0.125: E$2.18 12.71,14.06 14.52,12.25 17.15,12.25 17.4,12 20.71,12 21.09,11.38 22.66,11.38 23.65,12.25 23.9,12.5 LP$19.$1
C$19  (via drill 0.2)
  Route3 0.125: E$2.19 10.17,15.53 9.02,14.38 9.02,13.12 9.65,12.5 10.52,12.5 11.77,11.25 13.02,11.25 14.65,9.62 21.77,9.62 v23.77,11.62
  Bottom 0.125: v23.77,11.62 23.9,12.36 LP$24.$1
C$20  (via drill 0.2)
  Top 0.125: 24.04,14.62 LP$18.$1 24.31,15.38 v23.4,15.38
  Route3 0.125: E$2.20 16.8,13.78 17.27,14.38 18.02,15.38 v23.4,15.38
C$21  (via drill 0.2)
  Route3 0.125: E$2.21 13,13.78 14.02,12.75 14.02,11 14.9,10.12 16.4,10.12 18.77,12.62 19.27,13.12 21.9,13.12 v23.4,14.62
  Bottom 0.125: v23.4,14.62 24.46,14.66 LP$23.$1
C$22  (via drill 0.2)
  Route14 0.125: v23.4,23.88 19.02,23.88 17.65,22.5 15.02,22.5 14.02,21.5 14.02,13.82 E$2.22
  Bottom 0.125: LP$22.$1 24.55,24.65 23.77,23.88 v23.4,23.88
C$23  (via drill 0.2)
  Top 0.125: 24.55,24.65 LP$17.$1 23.91,24.5 v23.4,24.5
  Route14 0.125: E$2.23 10.17,11.78 11.4,13 11.4,20.5 12.15,21.25 13.15,21.25 14.77,22.88 17.4,22.88 18.77,24.25 23.15,24.25 v23.4,24.5
C$24  (via drill 0.2)
  Route3 0.125: v24.15,26.25 16.77,26.25 16.77,22.5 16.4,21.5 16.4,15.25 14.02,14.75 14.02,13.5 14.77,12.75 15.27,12.25 E$2.24
  Bottom 0.125: LP$21.$1 24.17,26.77 v24.15,26.25
D$1  (via drill 0.2)
  Top 0.125: v26.52,28.44 26.52,27.5 LP$16.$4 | U$1.21 72.95,24.93 72.78,24.62 71.78,24.62 71.65,24.5 70.78,24.5 v70.65,24.62
  Route3 0.125: v70.65,24.62 70.03,25.25 69.03,25.25 63.9,30.38 47.02,30.38 45.77,31.62 34.77,31.62 v33.52,30.12
  Route14 0.125: v33.52,30.12 31.52,30.12 29.52,28.12 26.77,28.12 26.52,28.38 v26.52,28.44
  Bottom 0.125: R$1.IN 34.9,29.12 v33.52,30.12
D$2  (via drill 0.2)
  Top 0.125: B$1.LF 27.4,28.62 v27.15,28.75
  Route3 0.125: v70.15,24.25 69.53,24.88 68.78,24.88 63.77,29.88 47.02,29.88 45.65,31.25 37.77,31.25 v36.52,30
  Route14 0.125: v36.52,30 36.02,30.62 28.9,30.62 v27.15,28.75
  Bottom 0.125: R$2.IN 36.32,29.05 36.52,29.25 v36.52,30 | v27.15,28.75 v27.14,28.75 27.14,28.88 26.77,29.25 LP$10.$4 | U$1.20 70.28,24.12 v70.15,24.25
D$3  (via drill 0.2)
  Top 0.125: U$1.19 73.03,24 72.9,23.88 70.65,23.88 70.53,23.75 69.78,23.75 v69.65,23.88
  Route3 0.125: v69.65,23.88 69.03,24.5 68.4,24.5 63.52,29.38 47.02,29.38 45.52,30.88 38.4,30.88 v37.65,30
  Route14 0.125: v37.65,30 37.15,29.5 31.9,29.5 27.4,25 24.15,25 23.4,25.75 21.15,25.75 v20.9,25.5
  Bottom 0.125: R$3.IN v37.65,30 | v20.9,25.5 20.9,24.12 LP$9.$4
D$4  (via drill 0.2)
  Top 0.125: v20.02,25.5 20.02,24.62 19.9,23.88 LP$3.$4 | B$2.LF 43.65,28.62 v44.4,29.38
  Route3 0.125: v69.15,23.5 68.65,24 68.28,24 63.4,28.88 47.02,28.88 46.52,29.38 v44.4,29.38 44.15,29.62 41.65,29.62 41.52,29.75 40.52,30.5 39.65,30.5 v39.15,30
  Route14 0.125: v39.15,30 38.65,29.25 37.77,29.25 37.65,29.12 32.02,29.12 27.65,24.5 24.15,24.5 23.27,25.38 21.65,25.38 21.15,24.88 20.52,24.88 v20.02,25.5
  Bottom 0.125: R$4.IN v39.15,30 | U$1.18 69.33,23.32 v69.15,23.5
D$5  (via drill 0.2)
  Top 0.125: U$1.17 74.45,23.2 73.03,23.12 69.78,23.12 69.65,23 68.78,23 v68.65,23.12
  Route3 0.125: v68.65,23.12 68.28,23.5 68.15,23.5 63.27,28.38 47.02,28.38 46.65,28.75 41.27,28.75 40.27,29.75 v40.27,30
  Route14 0.125: v40.27,30 40.27,30.12 39.65,30.75 36.52,30.75 36.27,31 28.4,31 25.77,28.38 25.77,27.75 26.9,26.62 26.9,26.12 26.15,25.38 24.27,25.38 23.15,26.5 21.4,26.5 21.4,27.5 v21.02,27.88
  Bottom 0.125: R$5.IN 40.65,29.12 40.27,29.5 v40.27,30 | v21.02,27.88 21.02,27.38 LP$8.$4
D$6  (via drill 0.2)
  Top 0.125: v20.15,27.88 20.15,27.51 LP$2.$4
  Route3 0.125: v68.15,22.75 63.02,27.88 52.15,27.88 v49.15,24.88 49.02,24.88
  Route14 0.125: v49.15,24.88 48.9,24.88 47.9,25.88 47.9,28 45.77,30.12 v43.02,30.12 41.4,31.38 28.27,31.38 25.27,28.5 25.27,27.62 26.4,26.5 26.4,26.12 26.02,25.75 24.9,25.75 24.65,26.12 24.65,26.62 24.02,27.25 24.02,28 23.65,28.38 20.65,28.38 v20.15,27.88
  Bottom 0.125: R$6.IN 41.9,29.12 v43.02,30.12 | B$8.LF 48.75,25.27 v49.15,24.88 | U$1.16 68.38,22.52 v68.15,22.75
D$7  (via drill 0.2)
  Top 0.125: U$1.15 74.42,22.4 73.05,22.4 73.03,22.38 68.65,22.38 68.53,22.25 67.78,22.25 v67.65,22.38
  Route3 0.125: v67.65,22.38 62.65,27.38 52.52,27.38 v49.02,23.88
  Route14 0.125: v49.02,23.88 49.4,23.88 50.27,24.75 50.27,26.5 48.77,28 48.77,33.88 47.02,33.88 45.65,32.5 27.9,32.5 24.9,29.88 21.65,29.88 v21.02,28.81
  Bottom 0.125: R$25.IN 48.65,23.62 v49.02,23.88 | v21.02,28.81 LP$7.$4
D$8  (via drill 0.2)
  Top 0.125: LP$1.$4 20.15,29.62 v20.15,28.81
  Route14 0.125: v20.15,28.81 20.15,30.38 24.9,30.38 27.77,32.88 45.4,32.88 46.77,34.25 49.27,34.25 49.27,28.62 50.77,27.25 | v67.15,22 67.15,27.38 52.52,27.38 52.4,27.25 50.77,27.25 | 50.77,27.25 50.77,24.62 49.02,22.88 v48.77,22.88
  Bottom 0.125: v48.77,22.88 R$7.IN | U$1.14 67.42,21.73 v67.15,22
D$9  (via drill 0.2)
  Top 0.125: v24.15,28.75 25.4,28.76 LP$15.$4 | B$3.LF 47.9,21.75 48.02,21.75 v48.52,21.62 | v66.65,21.62 66.78,21.5 67.65,21.5 67.78,21.62 74.55,21.62 U$1.13
  Route14 0.125: v24.15,28.75 24.65,29.12 28.02,32.12 45.9,32.12 47.27,33.5 48.27,33.5 48.27,27.75 49.77,26.25 49.77,24.75 49.4,24.38 48.15,24.38 48.15,22.12 v48.52,21.62 51.27,24.5 51.27,26.62 51.4,26.75 66.65,26.75 v66.65,21.62
  Bottom 0.125: R$8.IN 47.77,21.12 v48.52,21.62
D$10  (via drill 0.2)
  Top 0.125: v26.77,11.5 26.77,10.75 26.65,10.76 LP$20.$4 | U$1.11 73.05,17.73 72.9,17.88 67.78,17.88 67.53,18 66.9,18 v66.65,17.88
  Route14 0.125: v26.77,11.5 27.27,12.12 29.15,12.12 30.52,10.75 36.77,10.75 37.15,10.38 37.15,10 37.4,9.75 39.4,9.75 39.77,10.12 39.77,10.5 40.65,11.38 44.52,11.38 47.77,14.62 47.77,18.25 47.9,18.38 v48.4,18.38 48.77,18.38 50.27,16.88 50.27,12.5 50.52,12.25 66.65,12.25 v66.65,17.88
  Bottom 0.125: R$9.IN 47.77,19.12 v48.4,18.38
D$11  (via drill 0.2)
  Top 0.125: v19.65,11.5 19.9,11 19.9,10.75 LP$6.$4
  Route14 0.125: v48.4,17.62 48.9,17.62 49.52,17 49.52,11.75 | 49.52,11.75 45.9,8 29.52,8.12 28.65,9 21.77,9 19.65,11.12 v19.65,11.5 | v67.15,17.5 67.15,11.75 49.52,11.75
  Bottom 0.125: R$10.IN v48.4,17.62 | U$1.12 67.38,17.73 v67.15,17.5
D$12  (via drill 0.2)
  Top 0.125: U$1.9 73.1,16.93 72.9,17.12 68.9,17.12 68.78,17.25 67.78,17.25 v67.65,17.12
  Route3 0.125: v67.65,17.12 62.9,12.38 49.77,12.38 49.02,13.12 49.02,16.5 v48.9,16.62
  Route14 0.125: v48.9,16.62 48.9,13.88 43.52,8.5 29.65,8.5 28.77,9.38 22.52,9.38 v20.4,11.5
  Bottom 0.125: B$9.LF 48.15,16.3 R$11.IN v48.9,16.62 | v20.4,11.5 20.4,11 LP$14.$4
D$13  (via drill 0.2)
  Top 0.125: v21.4,11.88 21.15,12.38 20.27,12.88 LP$5.$4 19.77,13.76 19.77,13.88 19.49,14.16 TP4.TP
  Route3 0.125: v68.15,16.75 63.27,11.88 45.02,11.88 44.52,11.38 43.9,11.38 v42.9,10.25
  Route14 0.125: v42.9,10.25 42.9,10.12 41.65,8.88 29.77,8.88 28.9,9.75 23.65,9.75 v21.4,11.88
  Bottom 0.125: R$12.IN 41.95,11.2 v42.9,10.25 | U$1.10 68.33,16.93 v68.15,16.75
D$14  (via drill 0.2)
  Top 0.125: TP3.TP v21.34,14.31 | U$1.7 73.15,16.12 72.9,16.38 69.65,16.38 69.53,16.5 68.78,16.5 v68.65,16.38 | B$4.LF 43.65,11.62 v44.4,10.88
  Route3 0.125: v68.65,16.38 63.65,11.38 45.27,11.38 44.84,10.88 v44.4,10.88 43.27,9.75 40.77,9.75 v40.27,10.25
  Route14 0.125: v40.27,10.25 40.27,9.88 39.65,9.25 29.9,9.25 29.02,10.12 24.15,10.12 21.27,13 v21.34,14.31
  Bottom 0.125: R$26.IN 40.65,11.12 40.27,10.75 v40.27,10.25 | v21.34,14.31 21.15,14.25 21.15,13.12 LP$13.$4
D$15  (via drill 0.2)
  Top 0.125: TP1.TP v23.4,16.12
  Route3 0.125: v69.15,16 64.03,10.88 46.15,10.88 44.65,9.38 40.02,9.38 v39.15,10.25
  Route14 0.125: v39.15,10.25 37.9,11.5 31.02,11.5 26.4,16.12 v23.4,16.12 17.65,16.12 v17.65,19
  Bottom 0.125: R$27.IN v39.15,10.25 | U$1.8 69.28,16.12 v69.15,16 | v17.65,19 19.52,19 19.9,19.38 19.9,19.49 LP$4.$4
D$16  (via drill 0.2)
  Top 0.125: B$5.LF 33.3,11.53 32.77,11.25 32.77,11.12 31.65,11.12 28.77,14 23.52,14 v23.4,13.88 23.27,14 22.52,14 22.02,14.5 TP2.TP | U$1.5 72.95,15.32 72.53,15.75 69.78,15.75 v69.65,15.62
  Route3 0.125: v69.65,15.62 64.4,10.38 46.27,10.38 44.9,9 38.9,9 v37.65,10.25
  Route14 0.125: v37.65,10.25 37.65,10.88 37.4,11.12 30.77,11.12 27.27,14.62 24.27,14.62 v23.4,13.88
  Bottom 0.125: R$28.IN v37.65,10.25 | v23.4,13.88 23.02,14.12 22.34,14.12 21.21,15 21.21,15.62 LP$12.$4
D$17  (via drill 0.2)
  Route3 0.125: v70.15,15.25 69.65,14.75 69.28,14.75 64.53,10 46.52,10 45.15,8.62 38.15,8.62 v36.52,10.25
  Route14 0.125: v36.52,10.25 35.9,9.62 30.15,9.62 29.27,10.5 26.65,10.5 26.02,11.12 v26.02,11.5
  Bottom 0.125: R$29.IN 36.15,11.12 36.52,10.75 v36.52,10.25 | v26.02,11.5 26.02,11 26.52,10.13 LP$11.$4 | U$1.6 70.22,15.32 v70.15,15.25
D$18  (via drill 0.2)
  Top 0.125: v28.4,11.62 27.52,11.62 26.9,12.25 LP$19.$4 | U$1.3 72.88,14.53 72.4,15 70.78,15 v70.65,14.88
  Route3 0.125: v70.65,14.88 70.15,14.38 69.4,14.38 64.65,9.62 48.9,9.62 47.52,8.25 | 47.52,8.25 35.4,8.25 v33.52,10.12 | v47.52,7.25 47.52,8.25
  Route14 0.125: v33.52,10.12 30.27,10.12 28.77,11.62 v28.4,11.62
  Bottom 0.125: R$30.IN v33.52,10.12 | B$10.LF 48.15,8.25 47.52,7.62 v47.52,7.25
D$19  (via drill 0.2)
  Route3 0.125: v71.15,14.5 70.65,14 69.53,14 64.78,9.25 50.4,9.25 47.9,6.75 47.15,6.75 46.02,7.88 33.15,7.88 28.77,12.25 25.65,12.25 v25.4,11.88
  Bottom 0.125: R$19.IN 28.97,16.43 29.02,16.25 29.02,14.12 28.9,14 26.4,14 26.4,12.76 LP$24.$4 25.77,12.26 v25.4,11.88 | U$1.4 73.03,14.5 72.88,14.65 71.3,14.65 v71.15,14.5
D$20  (via drill 0.2)
  Top 0.125: v26.9,16.38 26.27,15.75 LP$18.$4 | U$1.1 73.05,13.72 72.9,13.88 72.78,13.88 72.4,14.25 71.78,14.25 v71.65,14.12
  Route3 0.125: v71.65,14.12 71.15,13.62 69.65,13.62 64.9,8.88 50.65,8.88 48.15,6.38 46.9,6.38 45.77,7.5 32.9,7.5 29.52,10.88 25.77,10.88 24.77,11.75 24.77,14.38 v26.9,16.38
  Bottom 0.125: R$20.IN 28.9,17.5 28.15,17.5 v26.9,16.38
D$21  (via drill 0.2)
  Top 0.125: v27.4,17.62 28.17,17.88 B$6.LF
  Route3 0.125: v72.15,13.75 71.65,13.25 69.78,13.25 65.03,8.5 50.9,8.5 48.4,6 46.65,6 45.52,7.12 32.65,7.12 29.27,10.5 25.65,10.5 24.4,11.62 24.4,14.75 v27.4,17.62
  Bottom 0.125: LP$23.$4 25.77,15.63 25.77,16 v27.4,17.62 29.02,19.12 R$21.IN | U$1.2 72.25,13.72 v72.15,13.75
D$22  (via drill 0.2)
  Route3 0.125: v72.15,25.75 71.28,26.62 69.9,26.62 64.65,31.88 50.15,31.88 48.15,33.88 46.9,33.88 45.77,32.75 34.4,32.75 25.77,24.12 v25.77,24
  Bottom 0.125: R$22.IN 28.65,21.12 v25.77,24 25.77,24.75 LP$22.$4 | U$1.24 72.3,25.73 v72.15,25.75
D$23  (via drill 0.2)
  Top 0.125: v26.77,24 26.77,24.5 LP$17.$4 | U$1.23 73,25.73 72.53,25.25 71.78,25.25 v71.65,25.38
  Route3 0.125: v71.65,25.38 70.9,26.12 69.65,26.12 64.4,31.38 50.02,31.38 47.9,33.5 47.27,33.5 46.15,32.38 34.77,32.38 26.77,24.38 v26.77,24
  Bottom 0.125: R$23.IN 29.02,22.75 28.02,22.75 v26.77,24
D$24  (via drill 0.2)
  Route3 0.125: v71.15,25 70.4,25.75 69.28,25.75 64.15,30.88 49.65,30.88 v47.52,33
  Route14 0.125: v47.52,33 46.27,31.75 28.15,31.75 24.77,28.62 24.77,27.38 v25.65,26.25
  Bottom 0.125: R$24.IN 28.97,24.2 29.02,24.25 29.02,26 28.77,26.25 v25.65,26.25 25.65,27 LP$21.$4 | B$7.LF 48.15,32.12 48.4,32.38 47.59,32.56 v47.52,33 | U$1.22 71.22,24.93 v71.15,25
DC$1  (via drill 0.2)
  Top 0.125: E$1.DC$01 35.27,25.38 v34.77,25.88
  Bottom 0.125: v34.77,25.88 34.77,27.07 R$1.OUT
DC$2  (via drill 0.2)
  Top 0.125: E$1.DC§02 35.98,25.43 v35.52,25.88
  Bottom 0.125: v35.52,25.88 35.77,26.12 35.77,26.75 R$2.OUT
DC$3  (via drill 0.2)
  Top 0.125: E$1.DC§03 38,25.85 v38.02,25.88
  Bottom 0.125: v38.02,25.88 38.02,26.82 R$3.OUT
DC$4  (via drill 0.2)
  Top 0.125: E$1.DC§04 38.8,25.77 v38.77,25.88
  Bottom 0.125: v38.77,25.88 38.77,26.82 R$4.OUT
DC$5  (via drill 0.2)
  Top 0.125: E$1.DC§05 40.7,25.3 v41.27,25.88
  Bottom 0.125: v41.27,25.88 41.02,26.12 41.02,26.7 R$5.OUT
DC$6  (via drill 0.2)
  Top 0.125: E$1.DC§06 41.52,25.38 v42.02,25.88
  Bottom 0.125: v42.02,25.88 42.02,26.75 41.9,27.07 R$6.OUT
DC$7  (via drill 0.2)
  Top 0.125: E$1.DC§07 43.52,22.75 v44.4,23
  Bottom 0.125: v44.4,23 44.65,23.25 45.52,23.25 45.77,23.5 45.9,23.5 45.98,23.57 R$25.OUT
DC$8  (via drill 0.2)
  Top 0.125: E$1.DC§08 v44.4,22.12
  Bottom 0.125: v44.4,22.12 45.27,22.12 R$7.OUT
DC$9  (via drill 0.2)
  Top 0.125: E$1.DC§09 v44.4,21.25
  Bottom 0.125: v44.4,21.25 45.4,21.25 R$8.OUT
DC$10  (via drill 0.2)
  Top 0.125: E$1.DC§10 v44.4,19
  Bottom 0.125: v44.4,19 45.4,19 R$9.OUT
DC$11  (via drill 0.2)
  Top 0.125: E$1.DC§11 v44.4,18
  Bottom 0.125: v44.4,18 45.52,18 R$10.OUT
DC$12  (via drill 0.2)
  Top 0.125: E$1.DC§12 43.65,17.5 v44.4,17.25
  Bottom 0.125: v44.4,17.25 44.65,17 45.9,17 R$11.OUT
DC$13  (via drill 0.2)
  Top 0.125: E$1.DC§13 41.52,14.88 v42.02,14.38
  Bottom 0.125: v42.02,14.38 42.02,13.12 R$12.OUT
DC$14  (via drill 0.2)
  Top 0.125: E$1.DC§14 40.77,14.88 v41.15,14.38
  Bottom 0.125: v41.15,14.38 41.02,14.25 41.02,13.25 40.9,13.12 R$26.OUT
DC$15  (via drill 0.2)
  Top 0.125: E$1.DC§15 v38.77,14.38
  Bottom 0.125: v38.77,14.38 38.77,13.25 R$27.OUT
DC$16  (via drill 0.2)
  Top 0.125: E$1.DC§16 v38.02,14.38
  Bottom 0.125: v38.02,14.38 38.02,13.12 R$28.OUT
DC$17  (via drill 0.2)
  Top 0.125: E$1.DC§17 36.02,14.75 v35.65,14.38
  Bottom 0.125: v35.65,14.38 35.77,14.38 35.77,13.12 35.9,13.12 R$29.OUT
DC$18  (via drill 0.2)
  Top 0.125: E$1.DC§18 35.27,14.88 v34.77,14.38
  Bottom 0.125: v34.77,14.38 34.77,13.12 R$30.OUT
DC$19  (via drill 0.2)
  Top 0.125: E$1.DC§19 33.15,17.5 v32.4,17.25
  Bottom 0.125: v32.4,17.25 32.15,17 31.2,17 R$19.OUT
DC$20  (via drill 0.2)
  Top 0.125: E$1.DC§20 33.1,18.2 v32.4,18
  Bottom 0.125: v32.4,18 31.45,18 R$20.OUT
DC$21  (via drill 0.2)
  Top 0.125: E$1.DC§21 32.42,19.02 v32.4,19
  Bottom 0.125: v32.4,19 31.45,19 R$21.OUT
DC$22  (via drill 0.2)
  Top 0.125: E$1.DC§22 33.12,21.23 v32.4,21.25
  Bottom 0.125: v32.4,21.25 31.4,21.25 R$22.OUT
DC$23  (via drill 0.2)
  Top 0.125: E$1.DC§23 33.1,22.05 v32.4,22.25
  Bottom 0.125: v32.4,22.25 31.4,22.25 R$23.OUT
DC$24  (via drill 0.2)
  Top 0.125: E$1.DC§24 33.27,22.75 v32.4,23
  Bottom 0.125: v32.4,23 32.15,23.25 31.02,23.25 30.95,23.32 30.95,23.5 R$24.OUT
N$1  (1 unrouted)
N$2  (1 unrouted)
N$3
  Top 0.3: E$1.RF$02_G1 37.1,25.8 arc49 36.98,26.02 35.29,27.32 arc-52 34.9,28.12 B$1.OUT
N$4
  Top 0.3: E$1.RF$04_G2 39.7,25.86 arc-50 39.82,26.08 41.5,27.32 arc53 41.9,28.13 B$2.OUT
N$5  (1 unrouted)
N$6  (1 unrouted)
N$7
  Top 0.3: E$1.RF$16_G5 37.1,14.45 arc-49 36.98,14.23 35.29,12.93 arc52 34.9,12.13 B$5.OUT
N$8
  Top 0.3: E$1.RF$14_G4 39.7,14.45 arc49 39.82,14.23 41.51,12.93 arc-52 41.9,12.13 B$4.OUT
N$9  (1 unrouted)
N$10  (1 unrouted)
N$11  (1 unrouted)
N$12
  Top 0.3: B$3.OUT E$1.RF$09_G3
N$13
  Bottom 0.3: B$9.OUT 46.3,13.38 arc-44 45.61,13.66 L$3.IN
N$14
  Bottom 0.3: L$2.IN 45.87,26.65 arc-39 46.51,26.88 B$8.OUT
N$15
  Bottom 0.3: B$9.HF 51.97,13.38 arc-46 52.7,13.07 52.79,12.97 arc-44 52.87,12.76 U$5.P$3
N$16  (1 unrouted)
N$17  (1 unrouted)
N$18  (1 unrouted)
N$19
  Bottom 0.3: B$7.HF 51.96,30.38 arc-47 52.7,30.05 52.79,29.95 arc-43 52.87,29.75 U$3.P$3
N$20
  Top 0.3: E$1.RF$21_G6 B$6.OUT
N$21  (1 unrouted)
  Bottom 0.3: 62.65,20.12 U$4.P$1
N$22
  Bottom 0.3: B$10.HF 51.97,9.88 arc47 52.7,10.19 52.79,10.29 arc43 52.87,10.49 U$5.P$2
N$23
  Bottom 0.3: B$8.HF 51.97,26.88 arc47 52.7,27.19 52.79,27.29 arc43 52.87,27.49 U$3.P$2
N$25
  Bottom 0.3: U$3.P$1 56.63,28.62 arc-90 58.63,26.62 U$4.P$3
N$26
  Bottom 0.3: U$5.P$1 56.62,11.62 arc90 58.62,13.62 U$4.P$2
RF$3
  Bottom 0.3: L$4.IN 31.02,13.68 arc51 30.65,12.9 30.65,11.04 arc45 30.94,10.33 32.36,8.92 arc45 33.06,8.62 45.49,8.62 arc45 46.19,8.92 46.86,9.58 arc-45 47.56,9.88 B$10.OUT
RF$4
  Bottom 0.3: L$1.IN 31.02,26.57 arc-51 30.65,27.35 30.65,29.21 arc-45 30.94,29.92 32.36,31.33 arc-45 33.06,31.62 45.49,31.62 arc-45 46.19,31.33 46.86,30.67 arc45 47.56,30.38 B$7.OUT
S$1  (via drill 0.2)  (5 unrouted)
  other vias: 59.59,20.12 60.15,20.12 62.65,20.12 62.02,20.12 61.4,20.12 60.77,20.12
S$116  (via drill 0.2)
  other vias: 34.04,16.18
S$145  (via drill 0.2)
  other vias: 42.76,16.18
S$165
  cutout Route2: 44.46,11.63 42.9,11.62 32.4,11.62 29.4,14.62 29.4,19.62 34.77,19.62 34.77,19.12 35.27,19.12 35.27,21.12 34.77,21.12 34.77,20.62 29.4,20.62 29.4,25.62 32.4,28.62 44.4,28.62 47.4,25.62 47.4,20.62 42.02,20.62 42.02,21.12 41.52,21.12 41.52,19.12 42.02,19.12 42.02,19.62 47.4,19.62 47.4,14.62
  cutout Route3: 44.46,11.63 42.9,11.62 32.4,11.62 29.4,14.62 29.4,19.62 34.77,19.62 34.77,19.12 35.27,19.12 35.27,21.12 34.77,21.12 34.77,20.62 29.4,20.62 29.4,25.62 32.4,28.62 44.4,28.62 47.4,25.62 47.4,20.62 42.02,20.62 42.02,21.12 41.52,21.12 41.52,19.12 42.02,19.12 42.02,19.62 47.4,19.62 47.4,14.62
  cutout Route14: 44.46,11.63 42.9,11.62 32.4,11.62 29.4,14.62 29.4,19.62 34.77,19.62 34.77,19.12 35.27,19.12 35.27,21.12 34.77,21.12 34.77,20.62 29.4,20.62 29.4,25.62 32.4,28.62 44.4,28.62 47.4,25.62 47.4,20.62 42.02,20.62 42.02,21.12 41.52,21.12 41.52,19.12 42.02,19.12 42.02,19.62 47.4,19.62 47.4,14.62
  cutout Route15: 44.46,11.63 42.9,11.62 32.4,11.62 29.4,14.62 29.4,19.62 34.77,19.62 34.77,19.12 35.27,19.12 35.27,21.12 34.77,21.12 34.77,20.62 29.4,20.62 29.4,25.62 32.4,28.62 44.4,28.62 47.4,25.62 47.4,20.62 42.02,20.62 42.02,21.12 41.52,21.12 41.52,19.12 42.02,19.12 42.02,19.62 47.4,19.62 47.4,14.62
  cutout Top: 44.46,11.63 42.9,11.62 32.4,11.62 29.4,14.62 29.4,19.62 34.77,19.62 34.77,19.12 35.27,19.12 35.27,21.12 34.77,21.12 34.77,20.62 29.4,20.62 29.4,25.62 32.4,28.62 44.4,28.62 47.4,25.62 47.4,20.62 42.02,20.62 42.02,21.12 41.52,21.12 41.52,19.12 42.02,19.12 42.02,19.62 47.4,19.62 47.4,14.62
  cutout Bottom: 44.46,11.63 42.9,11.62 32.4,11.62 29.4,14.62 29.4,19.62 34.77,19.62 34.77,19.12 35.27,19.12 35.27,21.12 34.77,21.12 34.77,20.62 29.4,20.62 29.4,25.62 32.4,28.62 44.4,28.62 47.4,25.62 47.4,20.62 42.02,20.62 42.02,21.12 41.52,21.12 41.52,19.12 42.02,19.12 42.02,19.62 47.4,19.62 47.4,14.62
S$167  (via drill 0.2)
  other vias: 33.7,24.36 33.7,24.36
S$169  (via drill 0.2)
  other vias: 33.7,15.89
S$172  (via drill 0.2)
  other vias: 43.1,15.89
S$173  (via drill 0.2)
  other vias: 42.76,24.07
S$214  (via drill 0.2)
  other vias: 43.1,24.36
S$215  (via drill 0.2)
  other vias: 34.04,24.07

## Text on the board
tPlace: 8 | 9 | 6 | RF-BOARD V3.2 / Iron Man | 1 | 23 | 4 | 23 | 1 | 3 | 5 | 9 | 7 | NO / SILVER / PASTE / OUTSIDE / THIS / AREA !! | 10 | 15 | 12 | 16 | 20 | 14 | 13 | 14 | 16 | 18 | 20 | 18 | 13 | 10 | IST Austria | 11
bPlace: 01 | 03 | 02 | 04 | 2 | 05 | 06 | 7 | 08 | 24 | 5 | 22 | 07 | 10 | 22 | 24 | 09 | 3 | 2 | 11 | 12 | 4 | 13 | 6 | 15 | 8 | 15 | 14 | 17 | 19 | 16 | 16 | 11 | 18 | 13 | 15 | 21 | 20 | 21 | 17 | 22 | 14 | 19 | 23 | 24 | 21 | 19 | 25 | 12 | 17